# Altium PCB PCB1.PcbDoc
Units mm, origin at the board's own origin, x right, y up, seen from the top; angles counter-clockwise.
Board outline 107.32 x 104.14 mm, 2 copper layers (Top Layer, Bottom Layer); 27 components, 18 nets, 111 pads, 0 vias.
Unrouted connection lines stored in the file: 3.
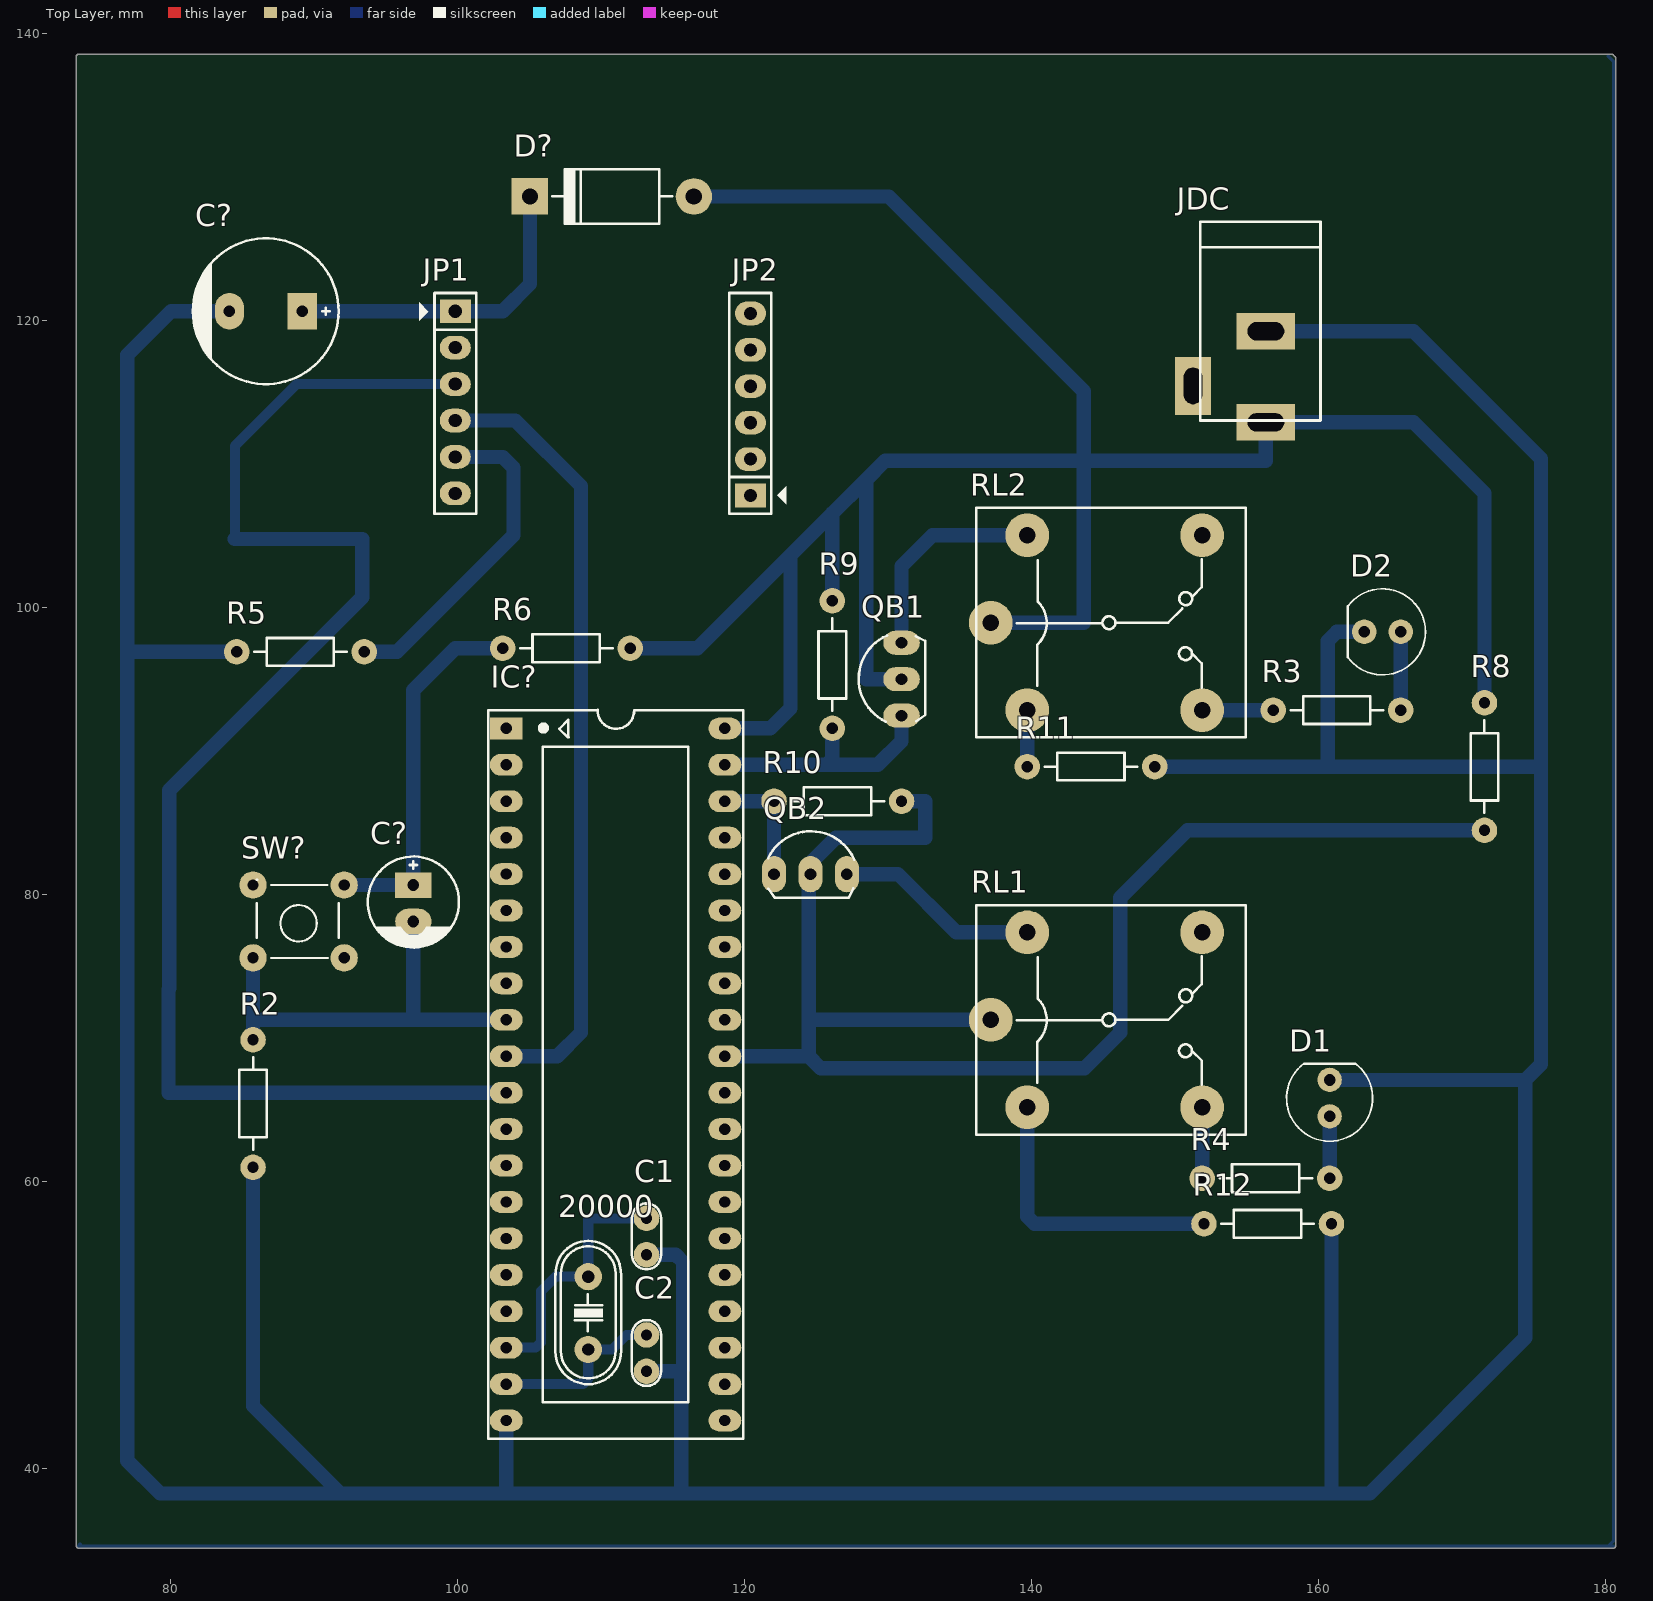
[diagram p0: Top Layer view]
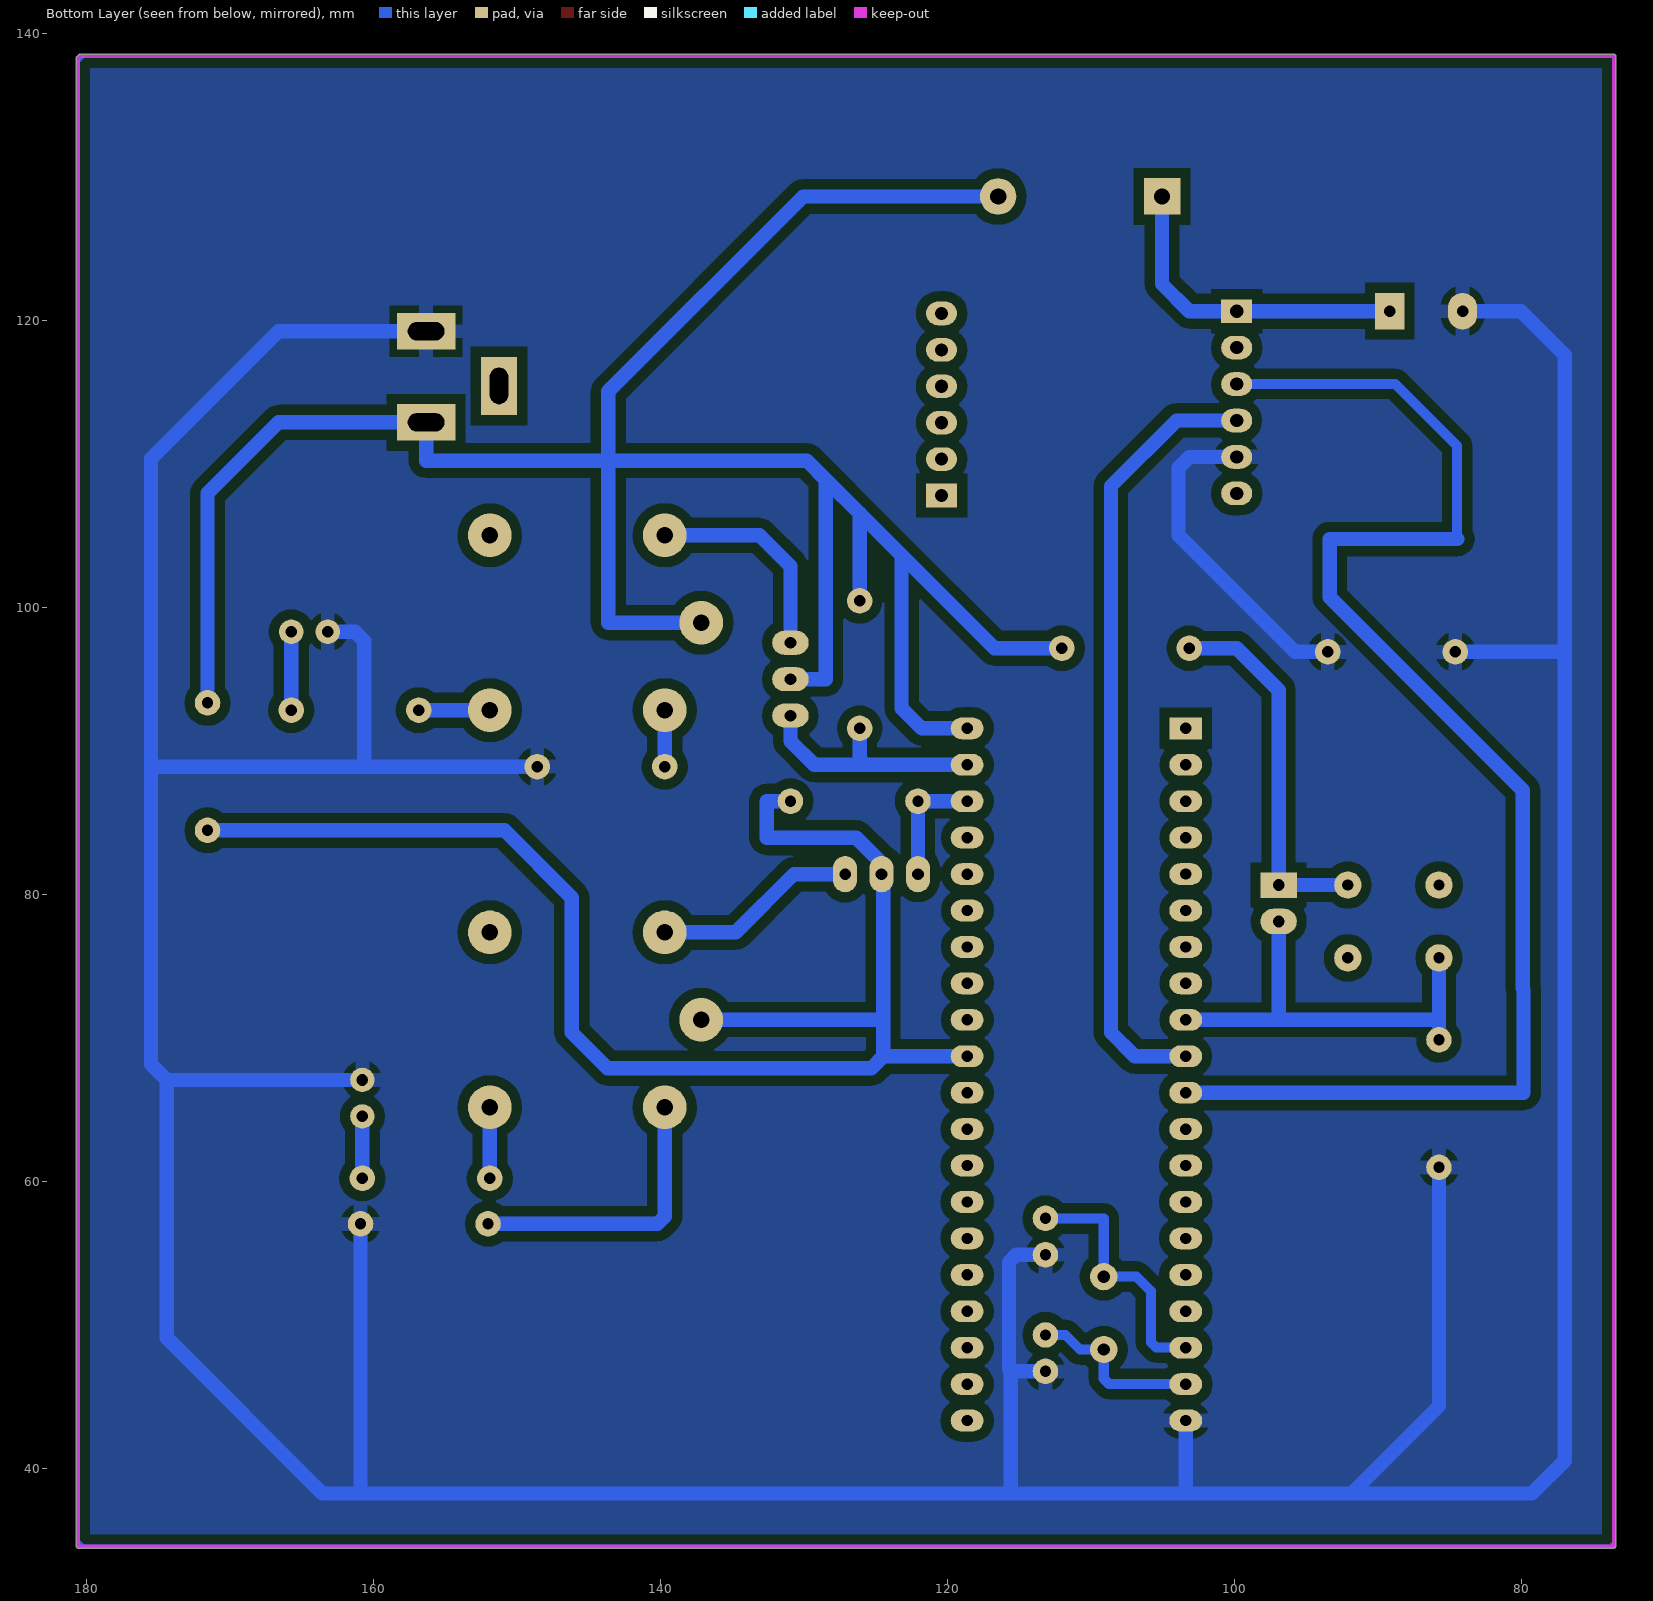
[diagram p1: Bottom Layer view, seen from below]
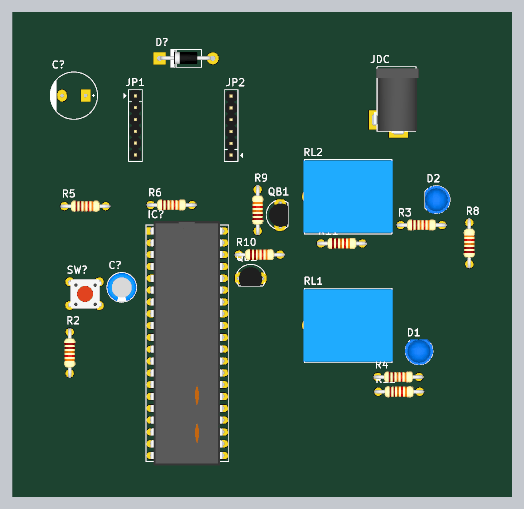
[diagram p2: 3D render of the assembled board from above, using the file's embedded part models]

## Layer stack, top to bottom
Top Solder: solder mask 0.0102, Solder Resist, Dk 3.5
Top Layer: signal copper 0.0356
Dielectric 1: dielectric 0.32, FR-4, Dk 4.8
Bottom Layer: signal copper 0.0356
Bottom Solder: solder mask 0.0102, Solder Resist, Dk 3.5

## Board outline
73.406,34.544 ccw(c73.533,34.544) 73.533,34.417 180.594,34.417 ccw(c180.594,34.544) 180.721,34.544 180.721,138.303 ccw(c180.594,138.303) 180.684,138.394 180.684,138.393 180.557,138.52 180.558,138.52 ccw(c180.467,138.43) 180.467,138.557 73.533,138.557 ccw(c73.533,138.43) 73.406,138.43

## Design rules (kind name [scope] priority, off if disabled: settings)
Clearance [All] p1: gap=0.7 ignorepadtopadclearanceinfootprint=FALSE
PlaneConnect [All] p1: planeconnectstyle=Relief reliefexpansion=0.508 reliefentries=4 reliefconductorwidth=0.3 reliefairgap=0.254
PolygonConnect [All] p1: connectstyle=Relief reliefconductorwidth=1 reliefentries=4 polygonreliefangle="90 Angle" airgapwidth=0.5
RoutingLayers [All] p1: top layer_v5=FALSE bottom layer_v5=TRUE
RoutingVias [All] p1: holewidth=0.711 width=1.27 viastyle="Through Hole" minholewidth=0.711 minwidth=1.27 maxholewidth=0.711 maxwidth=1.27
SolderMaskExpansion [All] p1: expansion=0.15
Width [All] p1: maxlimit=3 minlimit=0.5 preferedwidth=0.7
28 further rules are at their usual default settings.

## Components (designator, comment, footprint, x,y, rotation, side; value= is the part's Value field where it differs from the comment)
20000 "4Mhz" XT2 109.093,50.8 r270 top
C1 "100pF" CN1 113.157,54.864 r90 top
C2 "100pF" CN1 113.157,46.736 r90 top
C? "100uF/35V" CP1/2.5 96.901,80.645 r270 top value=100uF/35V/50V
C? "2200uF/16V" CP2/4 89.154,120.65 r180 top
D1 "LED" "LED-0 5mm BLUE" 160.782,65.786 r180 top
D2 "LED" "LED-0 5mm BLUE" 164.465,98.298 r270 top
D? "1N5408" D2A 105.029,128.651 r0 top
IC? "AT89S52" DIP40/W0.6 103.378,91.567 r270 top
JDC "Jac DC" DC-IN 153.797,116.078 r270 top
JP1 "JP6 PIN" JP6 99.822,120.65 r270 top value=JP7
JP2 "JP6 PIN" JP6 120.396,107.798 r90 top value=JP7
QB1 "D718" QTO-92 130.937,94.996 r90 top
QB2 "D718" QTO-92 124.587,81.407 r0 top
R2 "1k" R1/4W 85.725,60.96 r90 top value="R1/4W - 1K"
R3 "1k" R1/4W 165.735,92.837 r180 top value="R1/4W - 1K"
R4 "1k" R1/4W 160.782,60.198 r180 top value="R1/4W - 1K"
R5 "1k" R1/4W 93.472,96.901 r180 top value="R1/4W - 1K"
R6 "1k" R1/4W 112.014,97.155 r180 top value="R1/4W - 1K"
R8 "2k2" R1/4W 171.577,93.345 r270 top value="R1/4W - 1K"
R9 "330" R1/4W 126.111,100.457 r270 top value="R1/4W - 1K"
R10 "330" R1/4W 130.937,86.487 r180 top value="R1/4W - 1K"
R11 "330" R1/4W 148.59,88.9 r180 top value="R1/4W - 1K"
R12 "330" R1/4W 160.909,57.023 r180 top value="R1/4W - 1K"
RL1 "Relay 10A/12V" RL_SPDT_10A 137.16,71.247 r0 top value="Relay SPDT, 10A, 12V"
RL2 "Relay 10A/12V" RL_SPDT_10A 137.16,98.933 r0 top value="Relay SPDT, 10A, 12V"
SW? "SW" SW4 92.075,75.565 r180 top value="Button chip 4 pin"

## Footprints (in the part's own frame and the unit in brackets; to place one, negate y for a bottom-side part, rotate by r counter-clockwise, add the part's x,y. Pads: shape width x height; smd on the part's side, far side on the other; paste and mask are expansions set on the pad)
CN1 [mil]
  round 70 hole 31: 1(0,0) 2(100,0)
  silkscreen extent -40,-40 141,40, body extent -60,-30 170,37, height 265
CP1/2.5 [mil] "Tu hoa 33 >100 uF,50V, 220uF/16V,25V"
  rect 70x100 hole 32: 1(0,0)
  oval 70x100 hole 32: 2(100,0)
  silkscreen extent -78,-125 172,125, body extent -76,-124 172,124, height 422
CP2/4 [mil] "Tu hoa 1000uF/16V/25V"
  rect 80x100 hole 32: 1(0,0)
  oval 80x100 hole 32: 2(200,0)
  silkscreen extent -100,-200 300,200
D2A [mil] "Diode 2A, W 150mil, L 450mil"
  round 100 hole 45: 1(450,0)
  rect 100x100 hole 45: 2(0,0)
  silkscreen extent 61,-75 391,75, body extent 5,-47 435,54, height 100
DC-IN [mil] "Jac DC input"
  rect 100x160 hole 50 slot 100 at 90 deg: 1(125,100) 2(-125,100)
  rect 160x100 hole 50 slot 100 at 0 deg: 3(25,-100)
  silkscreen extent -425,-80 120,250, body extent -410,-105 134,269, height 434
DIP40/W0.6 [mil] "40 PIN, W 600mil, Pin to pin 100mil"
  rect 60x90 hole 31: 1(0,0)
  oval 60x90 hole 31: 2(100,0) 3(200,0) 4(300,0) 5(400,0) 6(500,0) 7(600,0) 8(700,0) 9(800,0) 10(900,0) 11(1000,0) 12(1100,0) 13(1200,0) 14(1300,0) 15(1400,0) 16(1500,0) 17(1600,0) 18(1700,0) 19(1800,0) 20(1900,0) 21(1900,600) 22(1800,600) 23(1700,600) 24(1600,600) 25(1500,600) 26(1400,600) 27(1300,600) 28(1200,600) 29(1100,600) 30(1000,600) 31(900,600) 32(800,600) 33(700,600) 34(600,600) 35(500,600) 37(300,600) 38(200,600) 39(100,600) 40(0,600)
  oval 60x90 hole 31.5: 36(400,600)
  silkscreen extent -50,-50 1950,650, body extent -82,-10 1982,600, height 224
JP6 [mil] "JP6"
  rect 65x85 hole 36: 1(0,0)
  oval 65x85 hole 36: 2(100,0) 3(200,0) 4(300,0) 5(400,0) 6(500,0)
  silkscreen extent -50,-99 556,58, body extent -48,-50 548,48, height 323
"LED-0 5mm BLUE" [mil] "Typical LED; BLUE; 2 Leads; Solder Pad 35mil"
  round 67 hole 32: 1(0,50) 2(0,-50)
  silkscreen extent -118,-96 118,118, body extent -118,-96 119,117, height 345
QTO-92 [mil] "TO-92"
  oval 66x100 hole 32: 1(-100,0) 2(0,0) 3(100,0)
  silkscreen extent -117,-65 120,118, body extent -109,-66 109,95, height 245
R1/4W [mil] "R 1/4W, 2 Pin, 350mil"
  round 70 hole 31: 1(0,0) 2(350,0)
  silkscreen extent 48,-38 302,38, body extent -40,-47 386,47, height 111
RL_SPDT_10A [mil] "Relay SPDT, 5 pin, 10A,W 650mil, L 800mil, H 800mil"
  round 120 hole 45: 1(0,0) 2(580,240) 3(580,-240) 4(100,-240) 5(100,240)
  silkscreen extent -40,-315 700,315, body extent -46,-304 706,306, height 602
SW4 [mil] "SW button 4pin, 250 x250 mil"
  round 75 hole 31: 1(0,0) 2(250,-200) 3(250,0) 4(0,-200)
  silkscreen extent 15,-215 240,0, body extent -36,-220 276,24, height 276
XT2 [mil] "Footpin for Crystal 2 pin"
  round 75 hole 34: 1(-100,0) 2(100,0)
  silkscreen extent -198,-90 195,90, body extent -233,-93 213,90, height 138

## Part data
20000: library part XT2, "Crystal For all Crystal 2pin."
C1 C2: library part CN1, "Cap np  1pF - 472pF"
C?: library part CP3, "Cap 100uF/35V - 470uF/16V", Description 1="1000uF/6,3V - 470uF/16V - 330uF - 25V", Description 2="220uF/35V - 100uF/50V - 63V - 4,7uF/200V", Description 3="22uF => 33uF100V - 3,3uF => 4,7uF/250V", Description 4="2,2uF =>3,3uF/350 - 2,2uF/400V - 1uF/450V"
C?: library part CP5, "Cap 2200uF/16V - 1000uF/50V", Description 1="4700uF-6800uF/6,3V - 3300uF-4700uF/10V", Description 2="2200uF-3300uF/16V - 470uF => 2200uF/25V", Description 3=1000uF/35V-50V_470uF/63V_220uF>330uF/100V, Description 4="47uF => 100uF/160V - 33uF-47uF/250V", Description 5="47uF/200V - 22uF/350V - 400V - 10uF/450V"
D1 D2: "Typical LED", LatestRevisionDate=08-Jul-2005, LatestRevisionNote="Mech Layer 1 removed.", PackageReference=LED-1, Published=8-Jun-2000, Publisher="Altium Limited"
D?: library part D5A, "Diode 5A"
IC?: "AT89S52, 8k Byte Flash Memory , 40 Pin"
JDC: library part DCIN, "Jac DC input"
JP1 JP2: library part JP6
QB1 QB2: "Transistor Power Supply"
R2 R3 R4 R5 R6 R8 R9 R10 R11 R12: library part R1/4W, "Resistor 1/4W"
RL1 RL2: library part "Relay 1", "Relay SPDT,10A - 12VDC 5 Pin", ="Relay SPDT, 10A, 24V"
SW?: library part SW4, "Switch button 4 pin"

## Nets (pads, with @x,y where several pads share a name; then routed paths per layer and width w, separated by ;. In a path a pad name is that pad's centre, name@x,y a point inside that pad or via, vN(x,y) a via of type N, cw(c..) or ccw(c..) an arc to the next point about the centre after c; other vN are vias at no path point)
8051_RX: IC?.10 JP1.4 | length 54.6
  Bottom Layer w1: JP1.4 104.013,113.03 108.585,108.458 108.585,70.358 106.934,68.707 IC?.10
8051_TX: IC?.11 JP1.3 | length 100.3
  Bottom Layer w0.7: 84.455,104.775 84.455,111.252 88.773,115.57 JP1.3
  Bottom Layer w1: 84.455,104.775 93.345,104.775 93.345,100.711 79.883,87.249 79.883,73.438 79.826,73.381 79.826,66.167 IC?.11
GND: C1.1 C2.1 C?.2@84.074,120.65 D1.2 D2.2 IC?.20 JDC.2 JP1.5 R2.1 R5.1 R5.2 R11.1 R12.1 | length 425.8
  Bottom Layer w1: C?.2@84.074,120.65 80.01,120.65 76.962,117.602 76.962,97.028 ; R5.2 77.089,96.901 76.962,97.028 ; R2.1 85.725,44.323 91.821,38.227 ; R5.1 95.758,96.901 103.886,105.029 103.886,109.728 103.124,110.49 JP1.5 ; 103.378,38.608 IC?.20 ; C2.1 115.57,46.736 ; C1.1 115.189,54.864 115.697,54.356 115.697,46.863 115.57,46.736 ; R11.1 160.655,88.9 ; JDC.2 166.624,119.253 175.514,110.363 175.514,88.9 ; D1.2 174.428,67.056 ; R12.1 160.909,38.227 ; D2.2 161.29,98.298 160.655,97.663 160.655,88.9 ; 76.962,97.028 76.962,40.513 79.248,38.227 91.821,38.227 ; 91.821,38.227 115.443,38.227 ; 115.443,38.227 160.909,38.227 ; 115.443,38.227 115.57,38.354 115.57,46.736 ; 160.655,88.9 175.514,88.9 ; 160.909,38.227 163.576,38.227 174.428,49.079 174.428,67.056 ; 174.428,67.056 175.514,68.142 175.514,88.9
Net20000_1: 20000.1 C1.2 IC?.18 | length 18
  Bottom Layer w0.7: IC?.18 105.41,48.387 105.791,48.768 105.791,52.324 106.807,53.34 20000.1 109.093,57.404 C1.2
Net20000_2: 20000.2 C2.2 IC?.19 | length 12.4
  Bottom Layer w0.7: IC?.19 108.712,45.847 109.093,46.228 20000.2 110.744,48.26 111.76,49.276 C2.2
NetC?_1: C?.1@89.154,120.65 D?.2 JP1.1 | length 22.8
  Bottom Layer w1: C?.1@89.154,120.65 JP1.1 103.124,120.65 105.029,122.555 D?.2
NetD1_1: D1.1 R4.1 | length 4.3
  Bottom Layer w1: R4.1 D1.1
NetD2_1: D2.1 R3.1 | length 5.5
  Bottom Layer w1: R3.1 D2.1
NetQB1_3: QB1.3 RL2.5 | length 15
  Bottom Layer w1: QB1.3 130.937,102.87 133.096,105.029 RL2.5
NetQB2_3: QB2.3 RL1.5 | length 14.3
  Bottom Layer w1: QB2.3 130.683,81.407 134.747,77.343 RL1.5
NetR3_2: R3.2 RL2.3 | length 5
  Bottom Layer w1: RL2.3 R3.2
NetR4_2: R4.2 RL1.3 | length 5
  Bottom Layer w1: R4.2 RL1.3
NetR11_2: R11.2 RL2.4 | length 4.1
  Bottom Layer w1: RL2.4 R11.2 R11.2@139.827,88.773
NetR12_2: R12.2 RL1.4 | length 20.1
  Bottom Layer w1: RL1.4 139.7,57.531 140.208,57.023 R12.2
P0.0: IC?.39 QB1.1 R9.2 | length 17.5
  Bottom Layer w1: IC?.39 125.73,89.027 ; R9.2 126.111,89.408 125.73,89.027 ; QB1.1 130.937,90.678 129.286,89.027 125.73,89.027
P0.1: IC?.38 QB2.1 R10.2 | length 8.5
  Bottom Layer w1: IC?.38 R10.2 QB2.1
RST: C?.2@96.901,78.105 IC?.9 R2.2 SW?.3 | length 30.2
  Bottom Layer w1: R2.2 85.725,71.247 ; SW?.3 85.725,71.247 ; 96.901,72.771 96.901,71.501 97.155,71.247 ; 96.901,72.898 C?.2@96.901,78.105 ; IC?.9 97.155,71.247 ; 85.725,71.247 97.155,71.247
VCC: C?.1@96.901,80.645 D?.1 IC?.31 IC?.40 JDC.1 QB1.2 QB2.2 R6.1 R6.2 R8.1 R8.2 R9.1 R10.1 RL1.1 RL2.1 SW?.4 | length 308.2
  Bottom Layer w1: SW?.4 96.901,80.645 96.901,94.234 99.822,97.155 R6.2 ; R6.1 116.713,97.155 123.19,103.632 ; D?.1 130.048,128.651 143.637,115.062 143.637,110.236 ; IC?.31 124.46,68.707 ; IC?.40 121.793,91.567 123.19,92.964 123.19,103.632 ; QB2.2 124.46,81.28 124.46,71.247 ; QB2.2@124.644,82.239 126.353,83.947 132.588,83.947 132.588,86.487 R10.1 ; R9.1 126.111,106.553 ; 130.175,110.236 129.794,110.236 ; QB1.2 128.467,94.996 128.467,108.769 128.397,108.839 ; RL1.1 124.46,71.247 ; RL2.1 143.637,98.933 143.637,110.236 ; R8.2 150.876,84.455 146.177,79.756 146.177,70.358 143.694,67.875 125.292,67.875 124.46,68.707 ; R8.1 171.577,107.95 166.624,112.903 JDC.1 156.337,110.236 146.558,110.236 143.637,110.236 ; 123.19,103.632 126.111,106.553 ; 124.46,68.707 124.46,71.247 ; 126.111,106.553 128.397,108.839 ; 128.397,108.839 129.794,110.236 ; 129.794,110.236 143.637,110.236
pads on no net: IC?.1 IC?.2 IC?.3 IC?.4 IC?.5 IC?.6 IC?.7 IC?.8 IC?.12 IC?.13 IC?.14 IC?.15 IC?.16 IC?.17 IC?.21 IC?.22 IC?.23 IC?.24 IC?.25 IC?.26 IC?.27 IC?.28 IC?.29 IC?.30 IC?.32 IC?.33 IC?.34 IC?.35 IC?.36 IC?.37 JDC.3 JP1.2 JP1.6 JP2.1 JP2.2 JP2.3 JP2.4 JP2.5 JP2.6 RL1.2 RL2.2 SW?.1 SW?.2
copper on no net: | length 211.6
  Bottom Layer w0.254: 73.66,34.671 73.533,34.544 180.594,34.544 ; 180.213,34.544 180.594,34.925 180.594,138.049 180.213,138.43 ; 350.266,334.645 350.393,334.772

## Polygon pours and split planes (outlines as drawn)
GND on Bottom Layer (solid, pour order 96): 180.467,138.43 180.467,35.052 180.594,34.925 73.533,34.925 73.533,138.176 73.787,138.43
no net on Bottom Layer "Bottom Layer-No Net" (solid, pour order 92): 73.533,138.43
no net on Bottom Layer "Bottom Layer-GND 4" (solid, pour order 66): 198.12,133.858
GND on Bottom Layer "Bottom Layer-GND 4" (solid, pour order 44): 74.168,126.492

## Keep-outs
Bottom Layer:
  lines w0.254: 73.533,34.544 73.533,138.43 180.467,138.43 180.594,138.303 180.594,34.544 73.533,34.544